# EAGLE board v2_sensor_only (EAGLE 8.2.1)
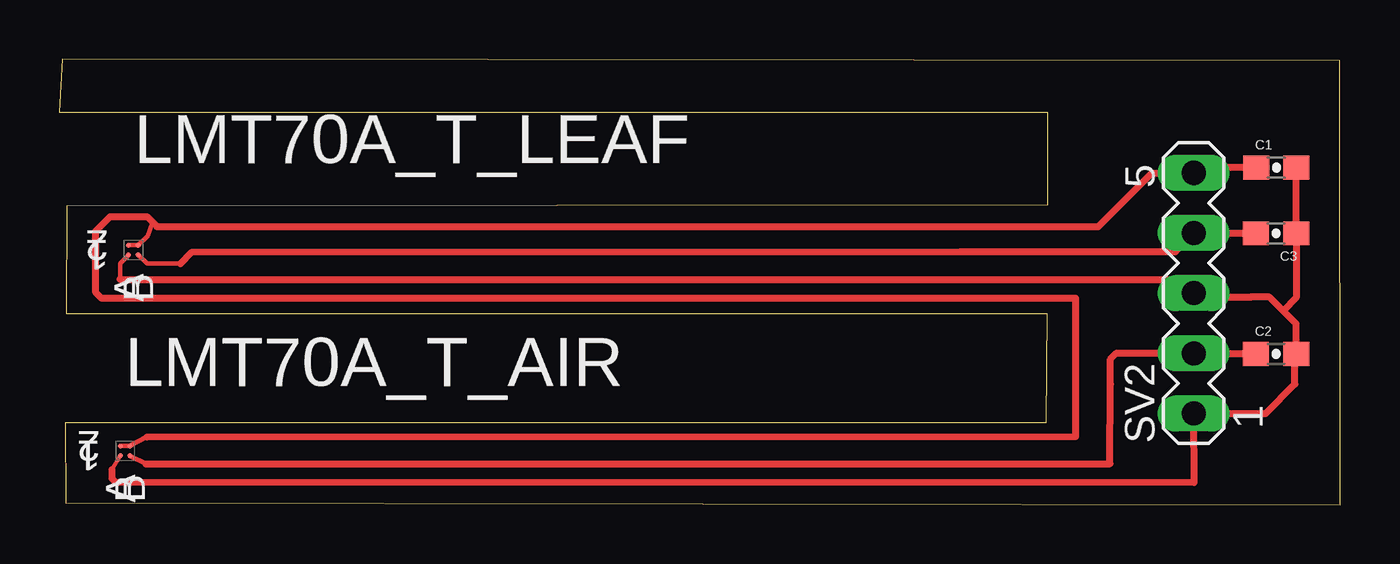
[diagram p0: board, top side]

Size 54.07 x 18.81 mm. Coordinates in mm from the lower left corner, seen from the top.
Outline: 54.07,0 54.04,18.74 0.12,18.81 0,16.57 41.7,16.57 41.7,12.64 0.32,12.6 0.3,8.08 41.69,8.08 41.65,3.45 0.26,3.45 0.28,0.07 54.07,0
Copper layers (1*16): Top 0.035mm / dielectric 1.5mm / Bottom 0.035mm
Design rules "default": minimum track width 10mil, minimum drill 24mil, track to track 8mil, track to pad 8mil, pad to pad 8mil, via to via 8mil, smd to smd 8mil, copper to edge 40mil, drill to drill 8mil, minimum pad ring 10mil, minimum via ring 8mil, stop-mask expansion 4mil, vias tented up to drill 0mil, thermal gap 10mil

## Footprints (pad centres in the part's own frame; a part is rotated, then mirrored left to right if it is on the bottom)
0603-CAP = smd 1.1 x 1: 1 -0.85,0; 2 0.85,0
BGA4C40P2X2_76X76X63 = smd 0.203 x 0.203: A1 -0.203,0.203; A2 0.203,0.203; B1 -0.203,-0.203; B2 0.203,-0.203
MA05-1 = drill 1.016 long: 1 -5.08,0; 2 -2.54,0; 3 0,0; 4 2.54,0; 5 5.08,0

## Placement (x,y rotation side)
C1  0.1uF  [0603-CAP]  51.37,14.23 0 top
C2  100 pF  [0603-CAP]  51.36,6.36 0 top
C3  100 pF  [0603-CAP]  51.36,11.46 180 top
LMT70A_T_AIR  INA216A1YFFR  [BGA4C40P2X2_76X76X63]  2.78,2.27 90 top
LMT70A_T_LEAF  INA216A1YFFR  [BGA4C40P2X2_76X76X63]  3.13,10.75 90 top
SV2  [MA05-1]  47.88,8.93 90 top

## Library data of the parts
C1-C3 = SparkFun-Capacitors; PROD_ID: CAP-08604
LMT70A_T_AIR LMT70A_T_LEAF = Texas Instruments_By_element14_Batch_1; MPN: INA216A1YFFR; OC_FARNELL: -; OC_NEWARK: 79R8069; PACKAGE: DSBGA-4; SUPPLIER: Texas Instruments
SV2 = con-lstb; OC_FARNELL: unknown; OC_NEWARK: unknown

## Nets
GND_A: C1.2 C2.2 C3.1 LMT70A_T_AIR.A1 LMT70A_T_LEAF.A1 SV2.1 SV2.3
VDD_A: C1.1 LMT70A_T_AIR.A2 LMT70A_T_AIR.B2 LMT70A_T_LEAF.A2 LMT70A_T_LEAF.B2 SV2.5
VOUT_AIR: C2.1 LMT70A_T_AIR.B1 SV2.2
VOUT_LEAF: C3.2 LMT70A_T_LEAF.B1 SV2.4

## Tracks (layer width: path | path; a pad name or v marks a point on that pad's centre or on a via)
GND_A
  Top 0.2: LMT70A_T_AIR.A1 2.22,1.47 | LMT70A_T_LEAF.A1 2.93,10.54 2.57,10.18 2.57,9.51
  Top 0.3: 2.22,1.47 2.22,1.11 2.37,0.96 47.9,0.94 SV2.1 50.23,3.85 | 2.57,9.51 39.26,9.5 | SV2.3 48.04,8.77 50.3,8.77
  Top 0.305: 50.23,3.85 50.92,3.85 52.16,5.09 52.16,6.31 C2.2 52.21,7.63 51.66,8.19 | 51.66,8.19 51.08,8.76 50.31,8.76 50.3,8.77 | 51.66,8.19 52.21,8.74 C3.1 C1.2 | 39.26,9.5 47.31,9.5 48.04,8.77
VDD_A
  Top 0.2: 2.57,2.47 LMT70A_T_AIR.A2 LMT70A_T_AIR.B2 3.7,2.86 | LMT70A_T_LEAF.A2 LMT70A_T_LEAF.B2 3.34,10.95 3.74,11.35 3.94,11.93
  Top 0.3: 3.7,2.86 42.9,2.88 42.9,8.71 1.79,8.71 1.55,8.95 1.55,11.56 2.15,12.16 3.71,12.16 3.94,11.93 4.13,11.74 36.73,11.74 | 46.11,14 SV2.5
  Top 0.305: C1.1 48.1,14.23 SV2.5 | 36.73,11.74 43.85,11.74 46.11,14
VOUT_AIR
  Top 0.2: LMT70A_T_AIR.B1 2.98,2.06 3.67,1.72
  Top 0.3: 3.67,1.72 44.35,1.73 44.37,5.08 44.37,6.15 44.62,6.4 SV2.2
  Top 0.305: C2.1 47.91,6.36 SV2.2
VOUT_LEAF
  Top 0.2: LMT70A_T_LEAF.B1 3.34,10.55 3.71,10.18 5.12,10.18
  Top 0.3: 38.03,10.68 5.6,10.66 5.12,10.18
  Top 0.305: SV2.4 C3.2 | SV2.4 | 38.03,10.68 47.11,10.68 SV2.4